# Altium PCB PCB1.PcbDoc (part 1 of 2)
Units mm, origin at the board's own origin, x right, y up, seen from the top; angles counter-clockwise.
Board outline 48.25 x 48.25 mm, 4 copper layers (Top Layer, Mid Layer 1, Mid Layer 2, Bottom Layer), stack 1.57 mm thick; 80 components, 62 nets, 377 pads, 167 vias.
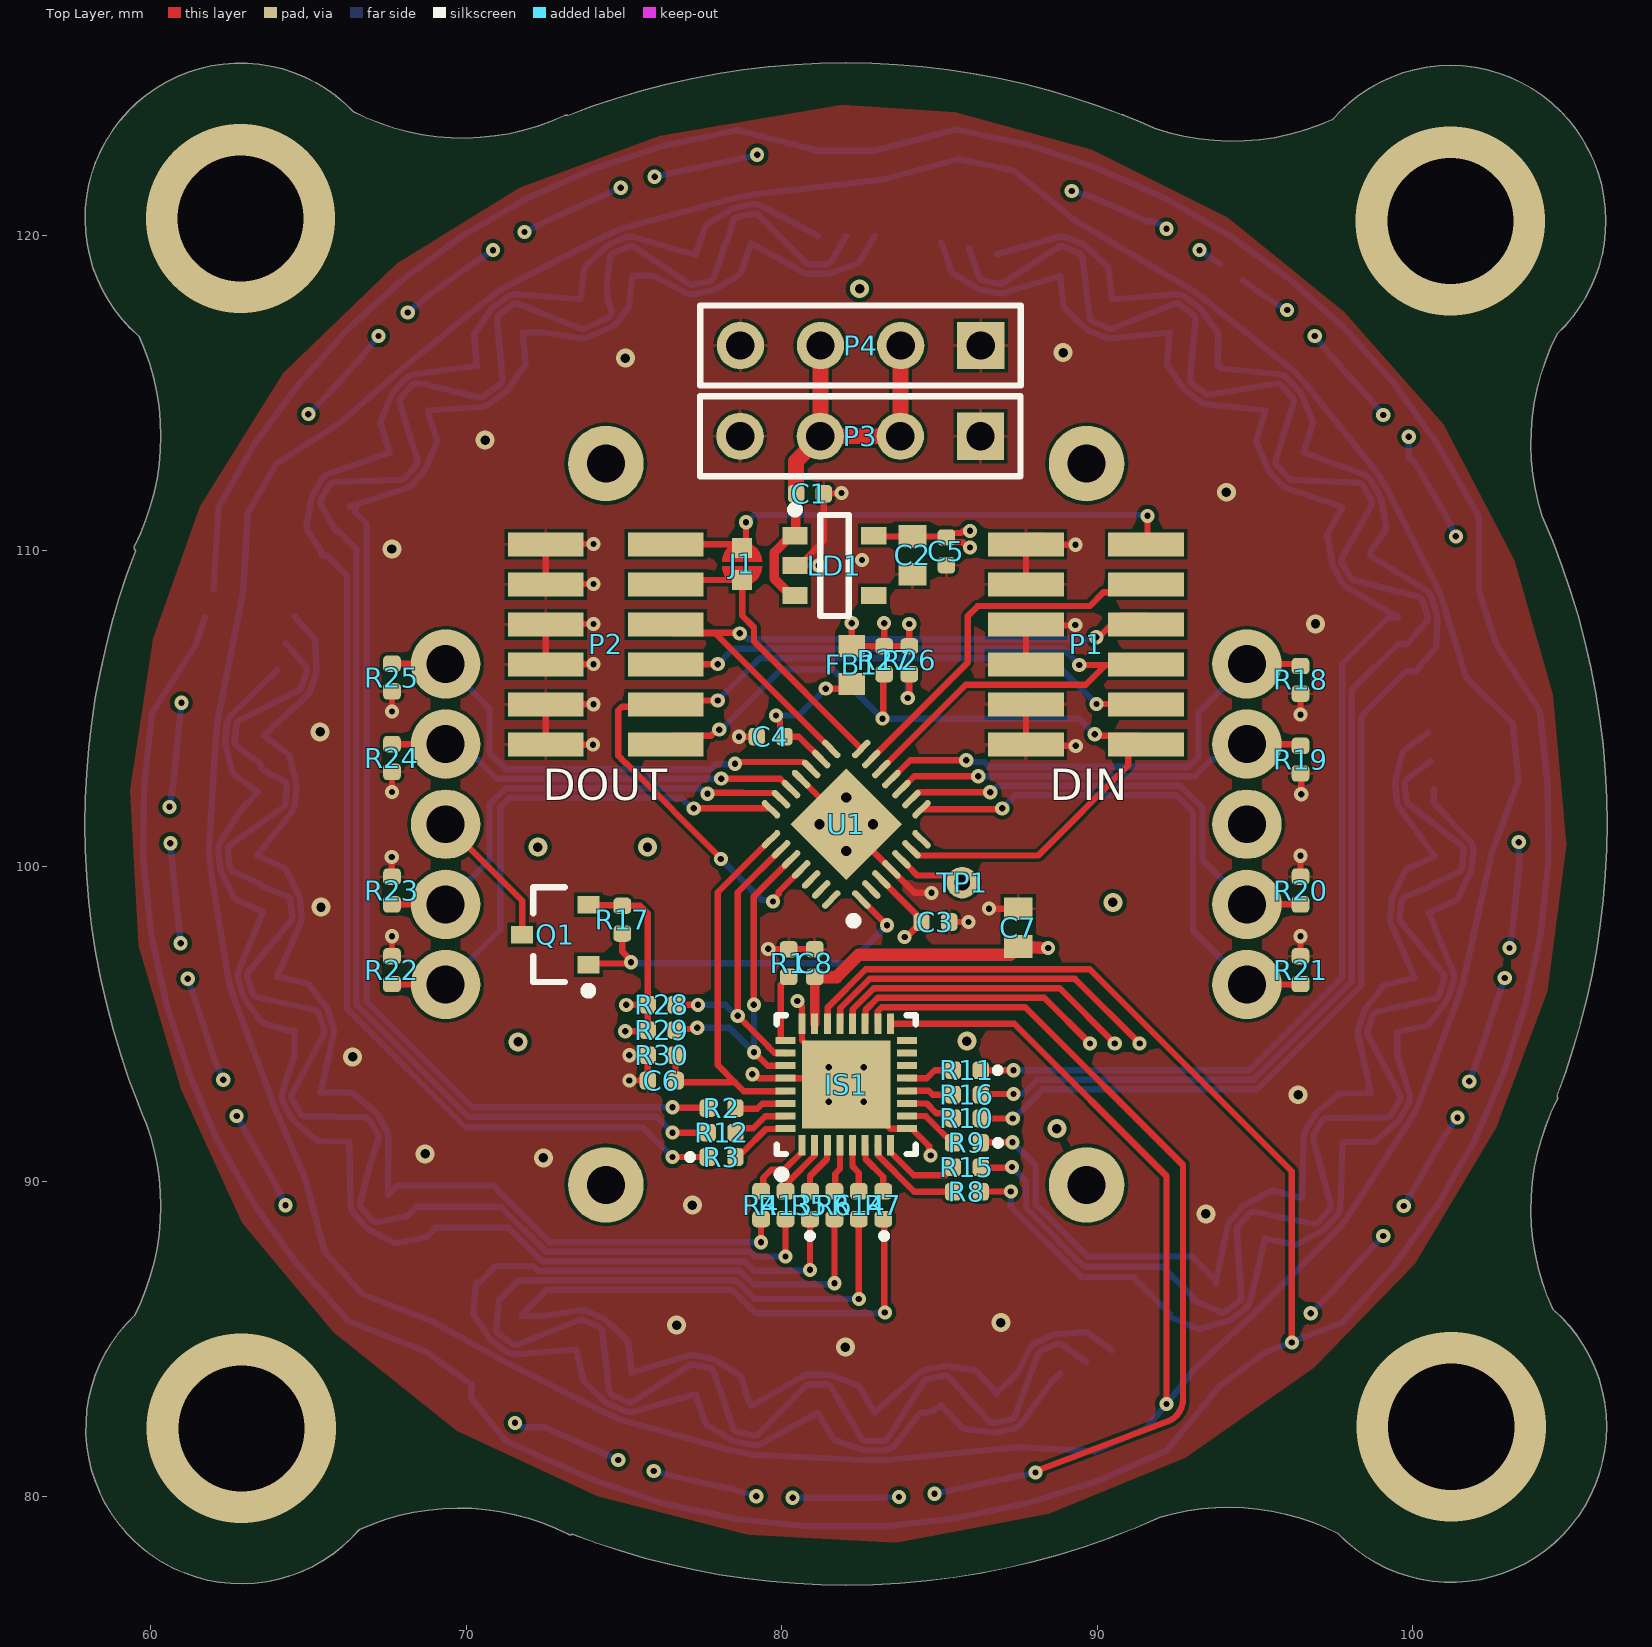
[diagram p0: Top Layer view]
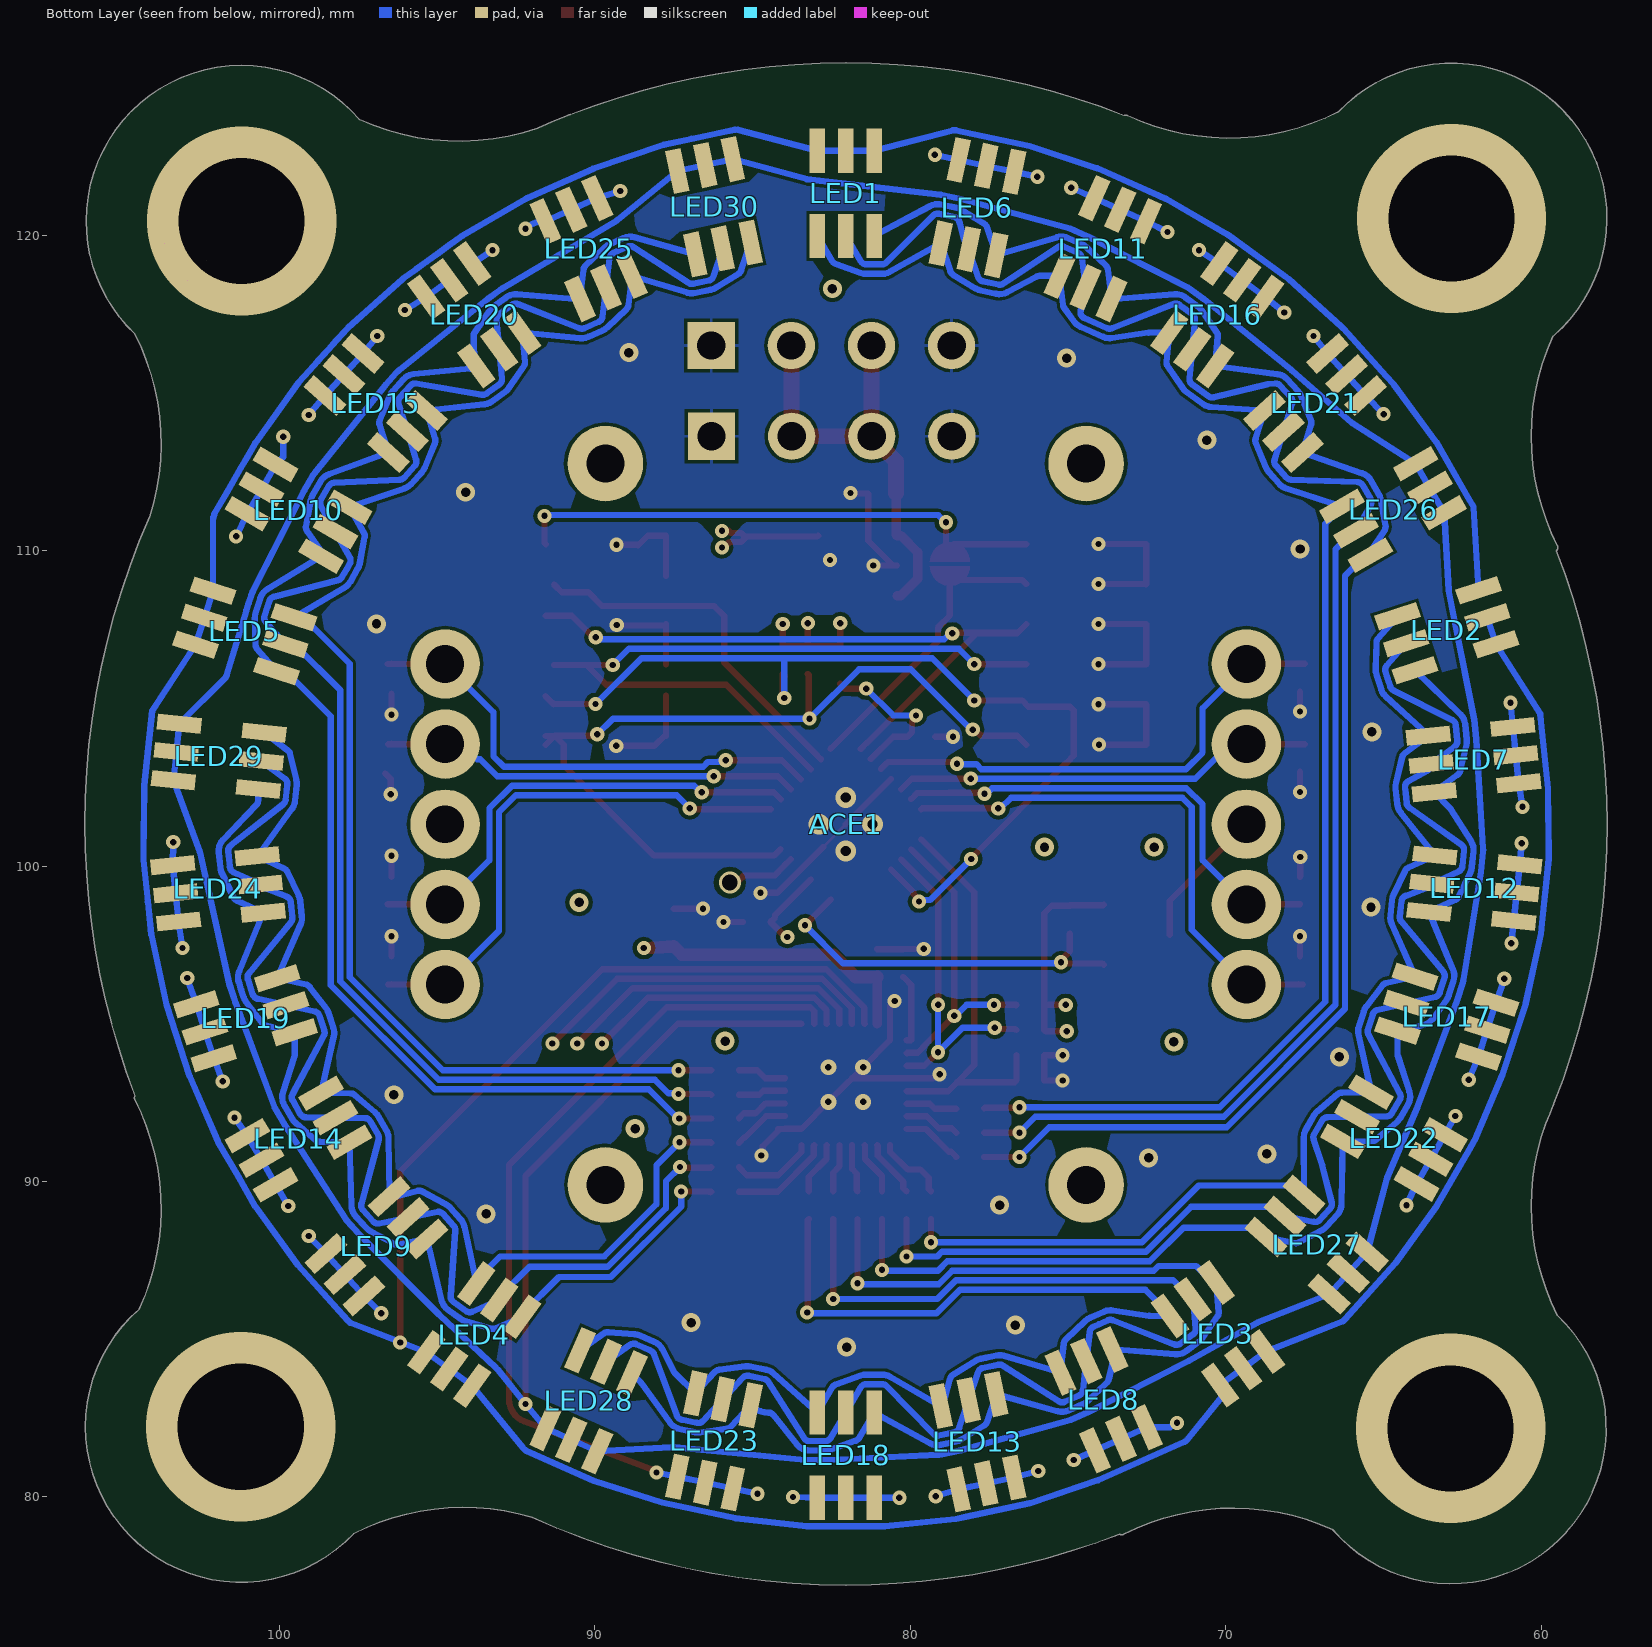
[diagram p1: Bottom Layer view, seen from below]
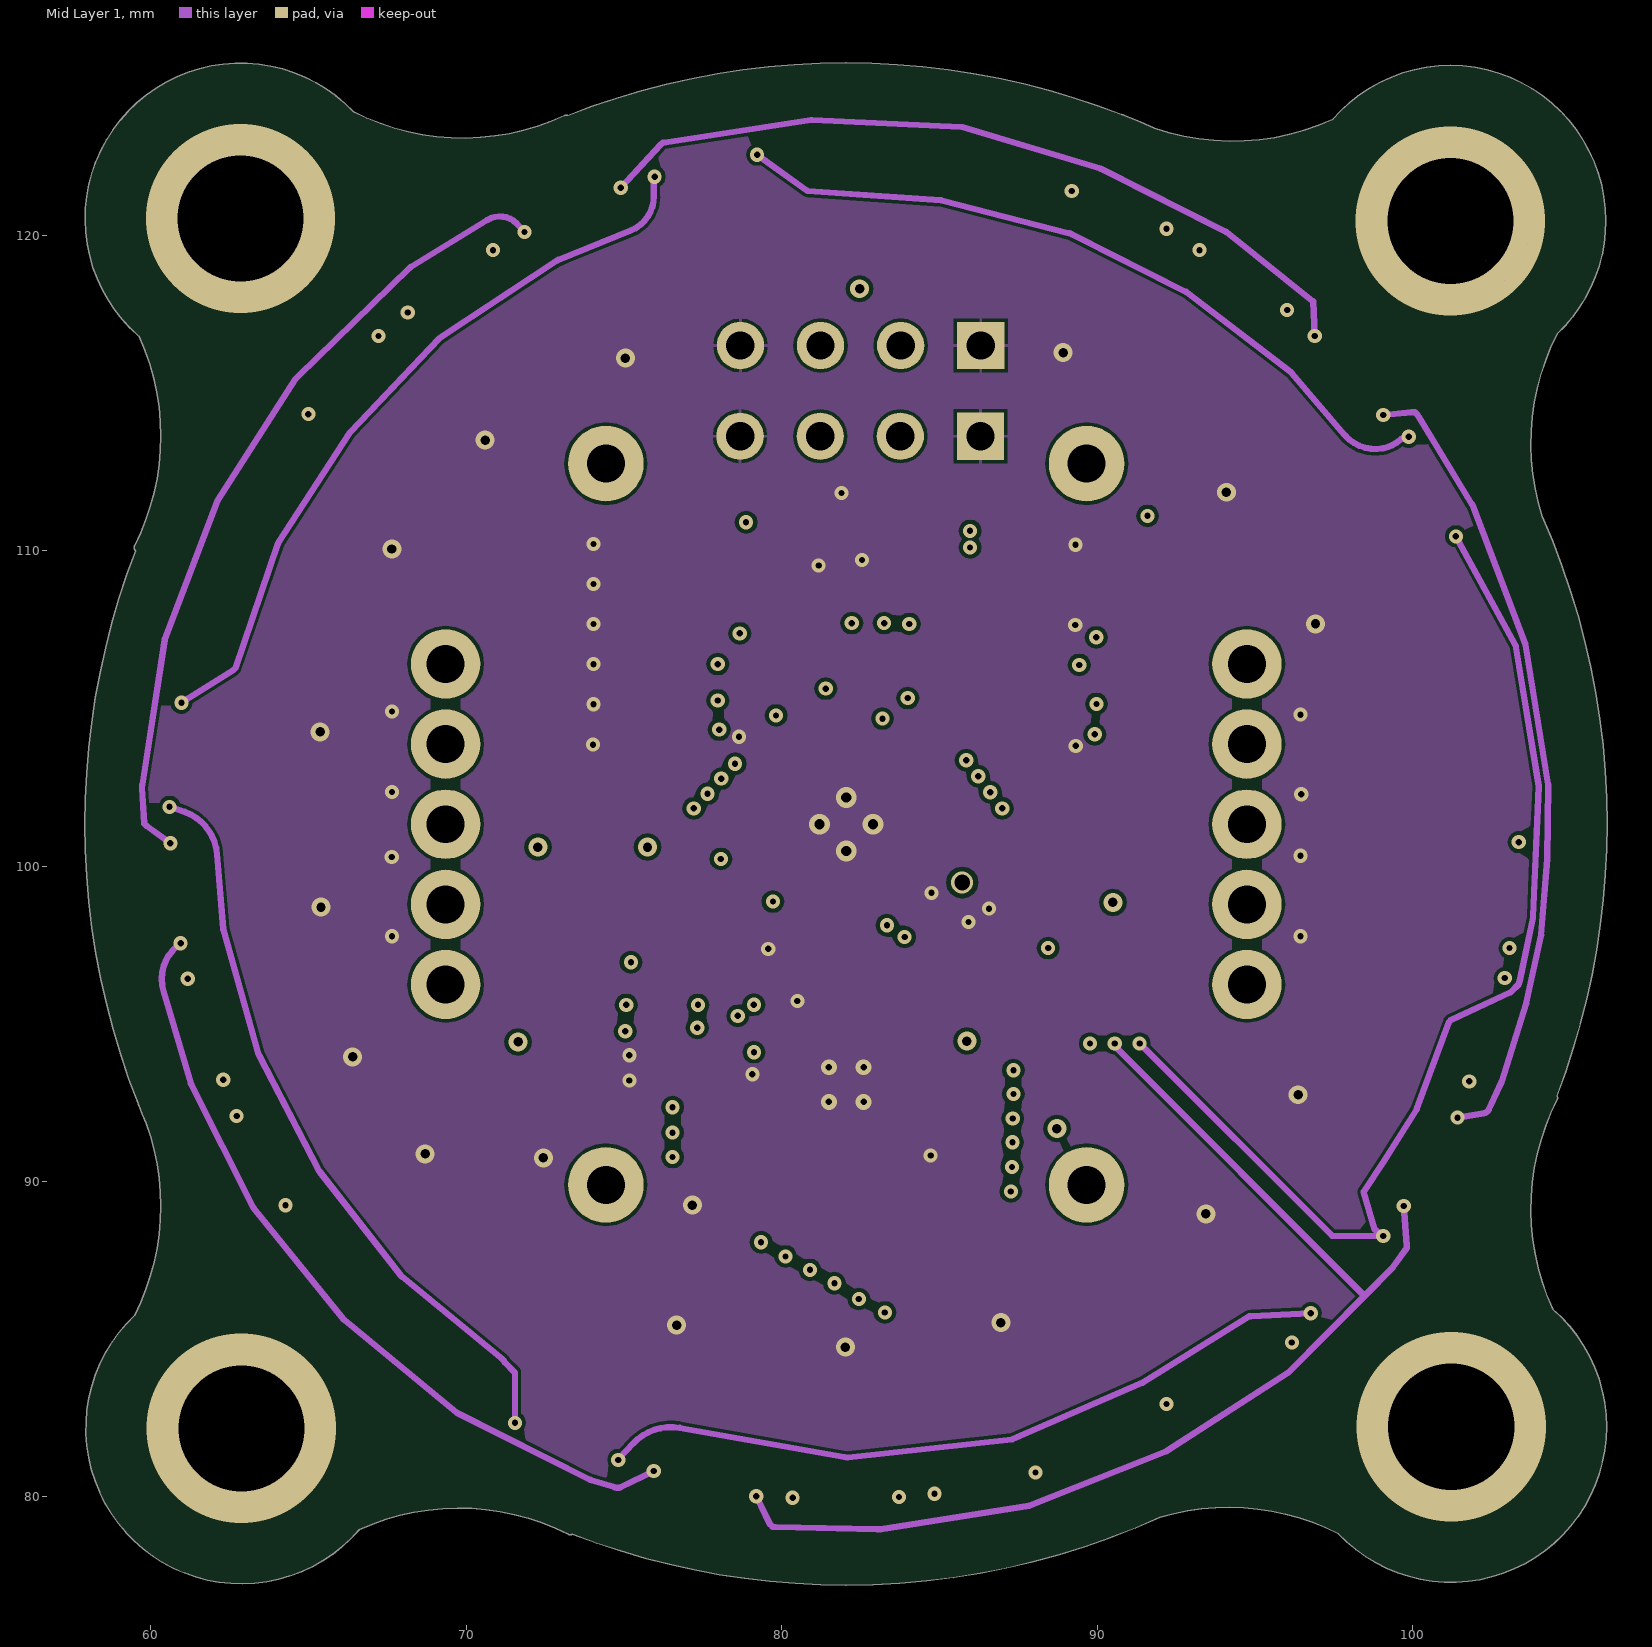
[diagram p2: Mid Layer 1]
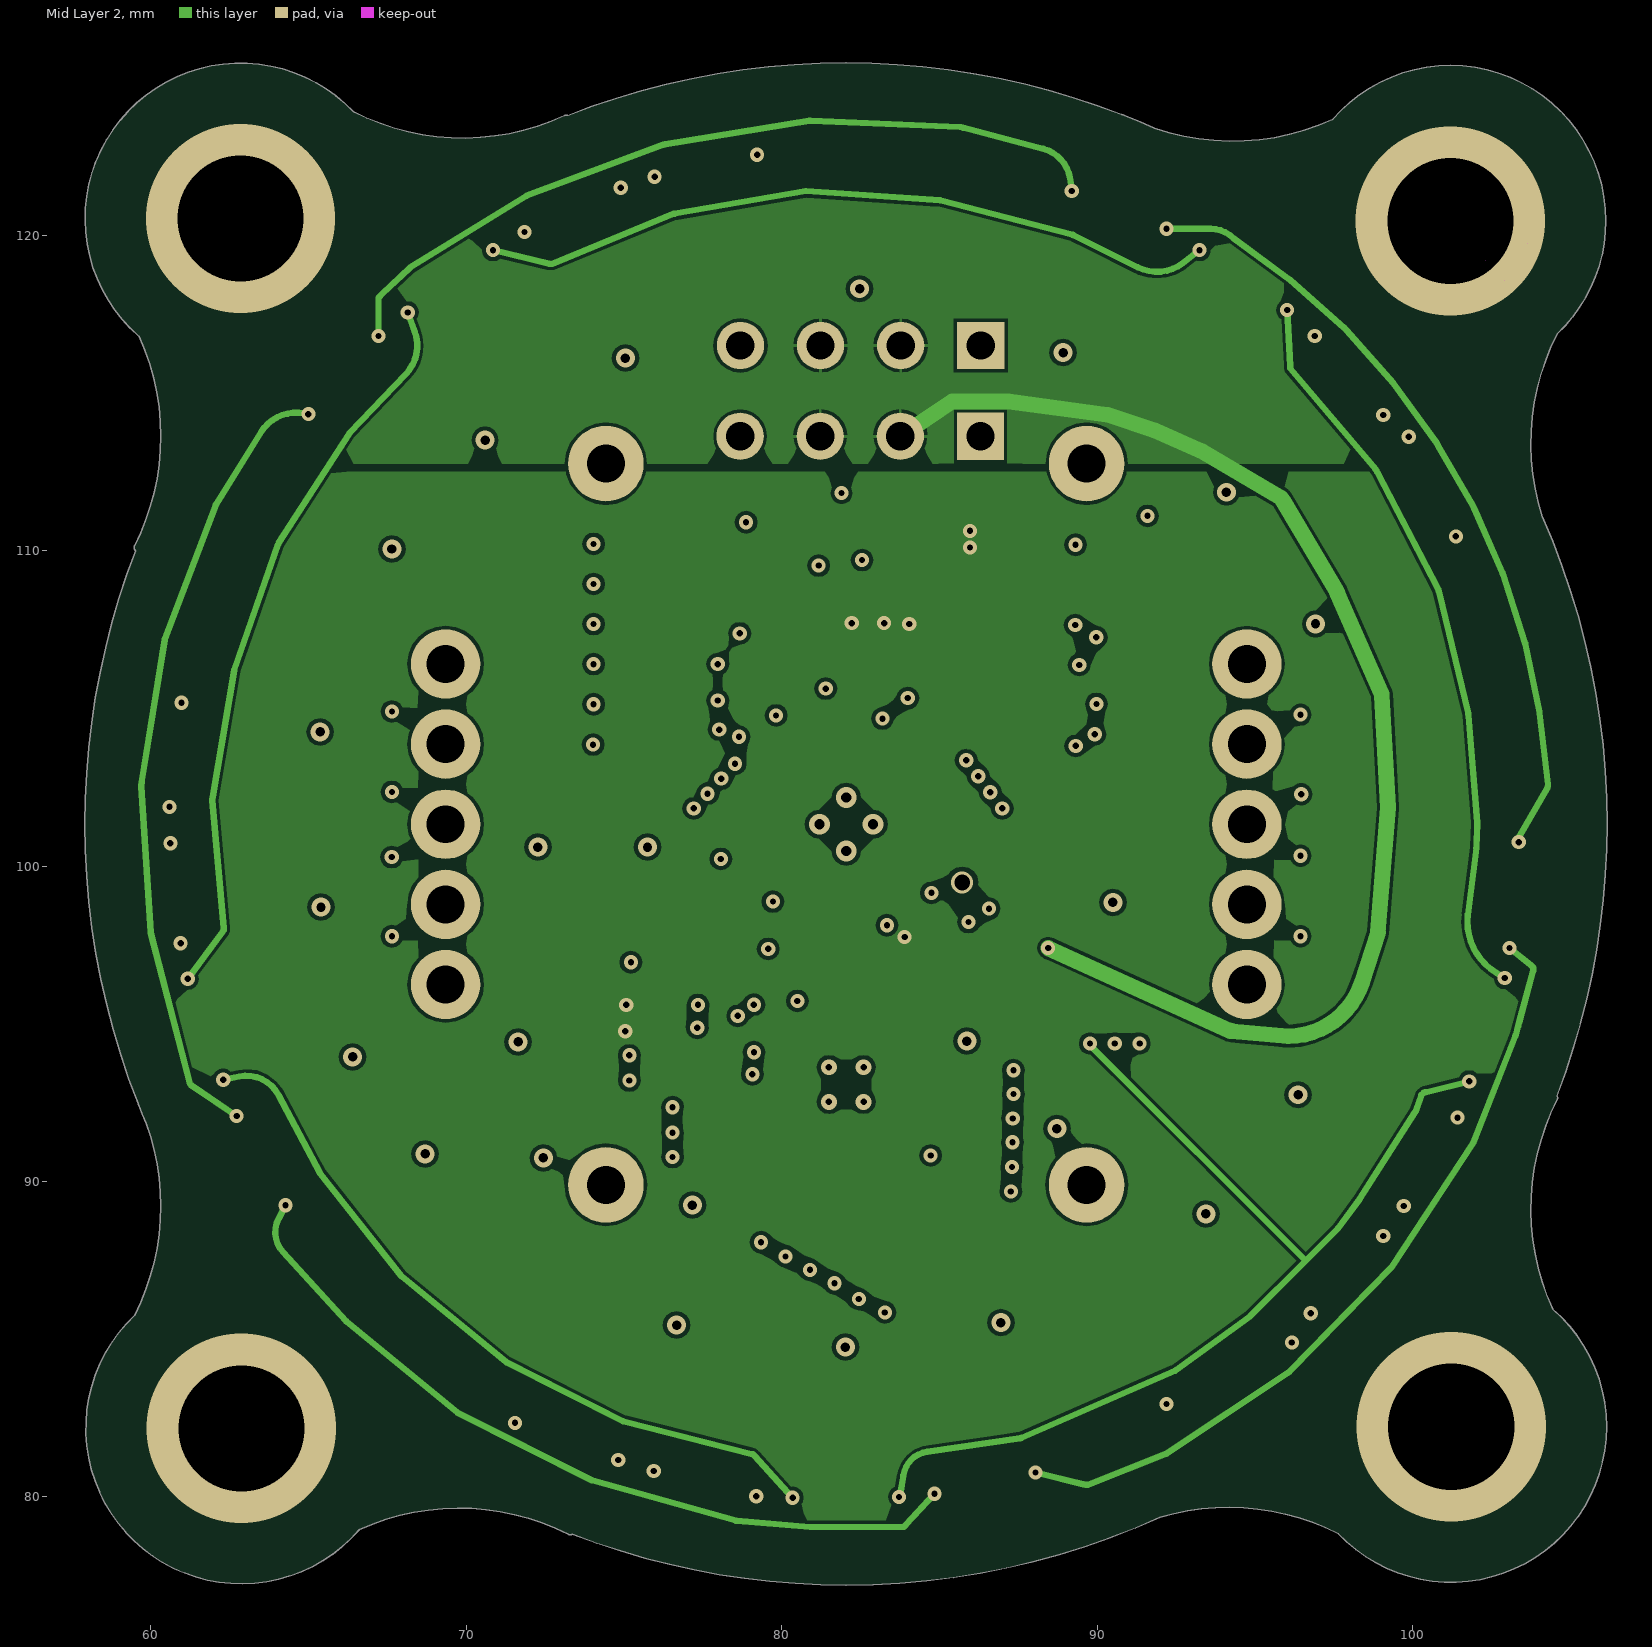
[diagram p3: Mid Layer 2]
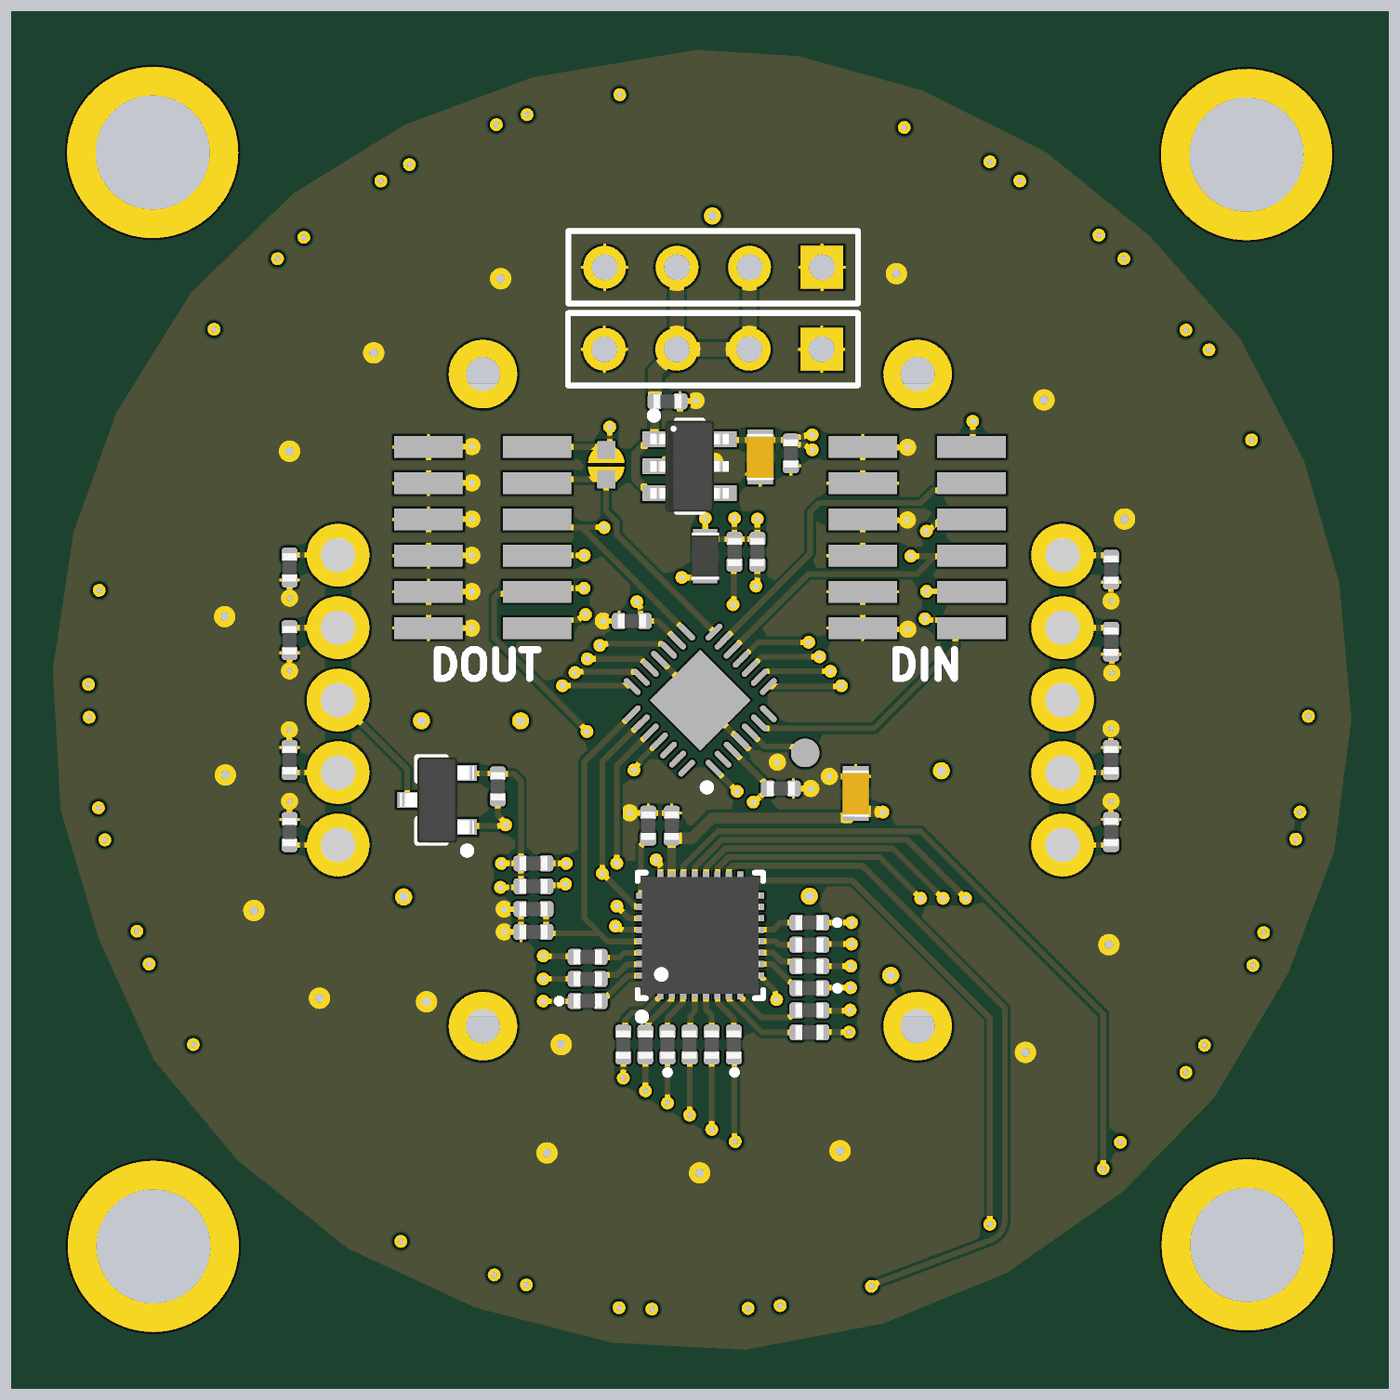
[diagram p5: 3D render of the assembled board from above, using the file's embedded part models]
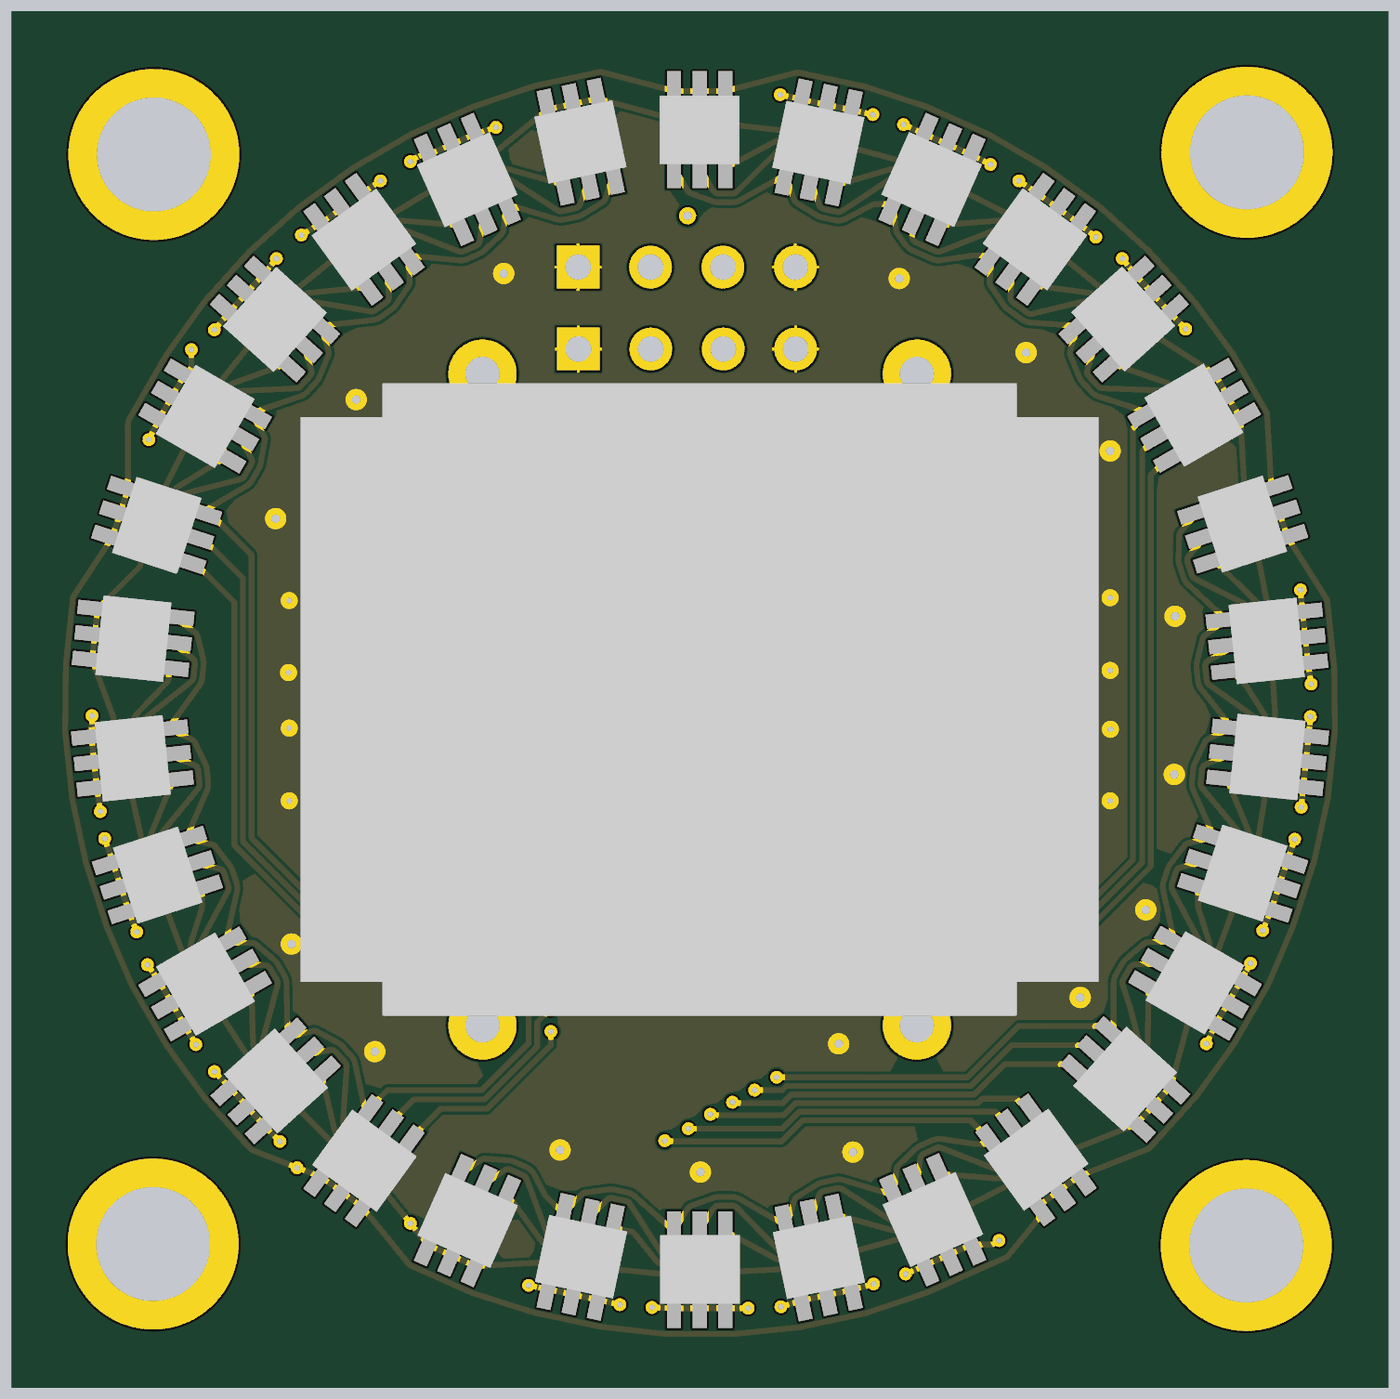
[diagram p6: 3D render of the assembled board from below, using the file's embedded part models]

## Layer stack, top to bottom
Top Solder: solder mask 0.0127, Solder Resist, Dk 3.8
Top Layer: signal copper 0.035
Dielectric 1: prepreg 0.2, 7628, Dk 4.6
Mid Layer 1: signal copper 0.0175
Core: core 1.065, FR-4, Dk 4.5
Mid Layer 2: signal copper 0.0175
Dielectric 2: prepreg 0.2, 7628, Dk 4.6
Bottom Layer: signal copper 0.035
Bottom Solder: solder mask 0.0127, Solder Resist, Dk 3.8

## Board outline
59.492,85.757 ccw(c52.685,89.223) 60.323,89.223 ccw(c52.685,89.223) 59.861,91.84 cw(c82.042,101.333) 59.619,92.426 ccw(c52.685,89.223) 59.61,92.446 cw(c59.725,92.5) 59.601,92.472 cw(c82.042,101.333) 57.915,101.333 cw(c82.042,101.333) 59.524,109.997 cw(c59.603,110.096) 59.49,110.154 ccw(c52.685,113.623) 60.323,113.623 ccw(c52.685,113.623) 59.635,116.79 cw(c62.85,120.525) 66.432,123.908 ccw(c69.898,130.715) 73.121,123.79 cw(c73.175,123.675) 73.226,123.792 cw(c82.042,101.333) 82.042,125.46 cw(c82.042,101.333) 90.776,123.824 cw(c90.771,123.697) 90.829,123.81 ccw(c94.298,130.615) 90.89,123.78 cw(c82.042,101.333) 91.821,123.39 ccw(c94.298,130.615) 97.465,123.665 cw(c101.2,120.45) 106.128,120.45 cw(c101.2,120.45) 104.583,116.868 ccw(c111.39,113.402) 104.115,111.075 cw(c82.042,101.333) 106.169,101.333 cw(c82.042,101.333) 104.58,92.721 cw(c104.472,92.654) 104.599,92.654 cw(c104.472,92.654) 104.585,92.596 ccw(c111.39,89.127) 104.44,85.96 cw(c101.225,82.225) 106.153,82.225 cw(c101.225,82.225) 97.643,78.842 ccw(c94.177,72.035) 91.998,79.356 cw(c82.042,101.333) 82.042,77.206 cw(c82.042,101.333) 73.369,78.819 cw(c73.304,78.928) 73.246,78.815 ccw(c69.777,72.01) 66.61,78.96 cw(c62.875,82.175)
cut-out: 102.925,118.55
cut-out: 103.65,119.75
cut-out: 102.325,119.2

## Design rules (kind name [scope] priority, off if disabled: settings)
BoardOutlineClearance [All] p1: gap=0.2 ignorepadtopadclearanceinfootprint=FALSE
Clearance [All] p1: gap=0.102 ignorepadtopadclearanceinfootprint=FALSE except(0.127: Arc-Via Track-Via SMDPad-Via THPad-Via Via-Via Via-Fill Via-Poly Via-Region Via-Text; 0.25: Arc-Hole Track-Hole SMDPad-Hole THPad-Hole Via-Hole Fill-Hole Poly-Hole Region-Hole Text-Hole)
ComponentClearance [All] p1: gap=0.102 collisioncheckmode=3 verticalgap=0.102 showdistances=TRUE
DiffPairsRouting [All] p1: maxlimit=0.102 minlimit=0.102 mostfreqgap=0.102 toplayer_minwidth=0.102 toplayer_maxwidth=1816.048 toplayer_prefwidth=0.102 midlayer1_minwidth=0.102 midlayer1_maxwidth=1816.048 midlayer1_prefwidth=0.102 midlayer2_minwidth=0.102 midlayer2_maxwidth=1816.048 midlayer2_prefwidth=0.102 bottomlayer_minwidth=0.102 bottomlayer_maxwidth=1816.048 bottomlayer_prefwidth=0.102 maxuncoupledlength=12.7
Height [All] p1: minheight=0 maxheight=1816.048 prefheight=12.7
HoleSize [All] p1: absolutevalues=TRUE maxlimit=6.3 minlimit=0.2 maxpercent=80.000 minpercent=20.000
HoleToHoleClearance [All] p1: gap=0.25 allowstackedmicrovias=FALSE
MinimumAnnularRing [All] p1: minimumring=0.076
MinimumSolderMaskSliver [All] p1: minsoldermaskwidth=0
PlaneClearance [All] p1: clearance=0.102
PlaneConnect PlaneConnectPowerPads [InPadClass('PowerPads')] p1: planeconnectstyle=Direct reliefexpansion=0.508 reliefentries=4 reliefconductorwidth=0.254 reliefairgap=0.254
PlaneConnect [All] p2: pad.planeconnectstyle=Relief pad.reliefexpansion=0.3 pad.reliefentries=4 pad.reliefconductorwidth=0.102 pad.reliefairgap=0.102 via.planeconnectstyle=Direct via.reliefexpansion=0.3 via.reliefentries=4 via.reliefconductorwidth=0.127 via.reliefairgap=0.127
PolygonConnect PolygonConnectPowerPads [All vs (InPadClass('PowerPads'))] p1: connectstyle=Direct reliefconductorwidth=0.254 reliefentries=4 polygonreliefangle="90 Angle" airgapwidth=0.254
PolygonConnect [All] p2: thpad.connectstyle=Relief thpad.reliefconductorwidth=0.102 thpad.reliefentries=4 thpad.polygonreliefangle="90 Angle" thpad.airgapwidth=0.102 smdpad.connectstyle=Relief smdpad.reliefconductorwidth=0.102 smdpad.reliefentries=4 smdpad.polygonreliefangle="90 Angle" smdpad.airgapwidth=0.102 via.connectstyle=Direct via.reliefconductorwidth=0.127 via.reliefentries=4 via.polygonreliefangle="90 Angle" via.airgapwidth=0.127
RoutingVias [All] p1: holewidth=0.2 width=0.45 viastyle="Through Hole" minholewidth=0.2 minwidth=0.45 maxholewidth=6.3 maxwidth=6.55
SilkToSilkClearance [All] p1: silktosilkclearance=0
SilkToSolderMaskClearance [IsPad] p1: minsilkscreentomaskgap=0.102 clearancetoexposedcopper=TRUE
SolderMaskExpansion [All] p1: expansion=0.075 istentingtop=FALSE
Width [All] p1: maxlimit=1816.048 minlimit=0.102 preferedwidth=0.102
20 further rules are at their usual default settings.

## Classes and differential pairs
component class U_led_ring: C7 C8 IS1 LED1 LED2 LED3 LED4 LED5 LED6 LED7 LED8 LED9 LED10 LED11 LED12 LED13 LED14 LED15 LED16 LED17 LED18 LED19 LED20 LED21 LED22 LED23 LED24 LED25 LED26 LED27 LED28 LED29 LED30 R2 R3 R4 R5 R6 R7 R8 R9 R10 R11 R12 R13 R14 R15 R16
component class U_ACE: ACE1 Q1 R17 R18 R19 R20 R21 R22 R23 R24 R25
component class main_sch: C1 C2 C3 C4 C5 C6 FB1 J1 LD1 P1 P2 P3 P4 R1 R26 R27 R28 R29 R30 TP1 U1

## Components (designator, comment, footprint, x,y, rotation, side; value= is the part's Value field where it differs from the comment)
ACE1 "Bourns ACE 128" "BOURNS ACE 128" 82.05,101.325 r0 bottom locked
C1 "100n" R1005_0402i_L 80.9,111.8 r0 top
C2 "1u" C1608_0603I_L 84.15,109.85 r270 top
C3 "100n" R1005_0402i_L 84.875,98.225 r0 top
C4 "100n" R1005_0402i_L 79.65,104.1 r180 top
C5 "100n" R1005_0402i_L 85.225,109.975 r270 top
C6 "100n" R1005_0402i_L 76.2,93.2 r180 top
C7 "1u" C1608_0603I_L 87.5,98.05 r90 top
C8 "100n" R1005_0402i_L 81.05,96.925 r90 top
FB1 "FERITTE BEAD" R1608_0603I_L 82.225,106.375 r270 top
IS1 "IS31FL3729" QFN40P400X400X80_HS-33L 82.05,93.075 r90 top
J1 "Terminator" solderJumper 78.75,109.575 r270 top
LD1 "NCP115 3.3V" TSOP95P280X110-6L 81.675,109.525 r0 top
LED1 "SMB-LED" ASMB-LED 82.05,121.325 r270 bottom
LED2 "SMB-LED" ASMB-LED 63,107.475 r342 bottom
LED3 "SMB-LED" ASMB-LED 70.25,85.175 r54 bottom
LED4 "SMB-LED" ASMB-LED 93.825,85.15 r126 bottom
LED5 "SMB-LED" ASMB-LED 101.1,107.45 r198 bottom
LED6 "SMB-LED" ASMB-LED 77.875,120.875 r282 bottom
LED7 "SMB-LED" ASMB-LED 62.15,103.375 r354 bottom
LED8 "SMB-LED" ASMB-LED 73.875,83.075 r66 bottom
LED9 "SMB-LED" ASMB-LED 96.925,87.95 r138 bottom
LED10 "SMB-LED" ASMB-LED 99.4,111.275 r210 bottom
LED11 "SMB-LED" ASMB-LED 73.9,119.575 r294 bottom
LED12 "SMB-LED" ASMB-LED 62.125,99.3 r6 bottom
LED13 "SMB-LED" ASMB-LED 77.875,81.75 r78 bottom
LED14 "SMB-LED" ASMB-LED 99.4,91.35 r150 bottom
LED15 "SMB-LED" ASMB-LED 96.95,114.675 r222 bottom
LED16 "SMB-LED" ASMB-LED 70.275,117.475 r306 bottom
LED17 "SMB-LED" ASMB-LED 63,95.225 r18 bottom
LED18 "SMB-LED" ASMB-LED 82.05,81.325 r90 bottom
LED19 "SMB-LED" ASMB-LED 101.075,95.175 r162 bottom
LED20 "SMB-LED" ASMB-LED 93.825,117.475 r234 bottom
LED21 "SMB-LED" ASMB-LED 67.175,114.675 r318 bottom
LED22 "SMB-LED" ASMB-LED 64.675,91.375 r30 bottom
LED23 "SMB-LED" ASMB-LED 86.225,81.775 r102 bottom
LED24 "SMB-LED" ASMB-LED 101.95,99.275 r174 bottom
LED25 "SMB-LED" ASMB-LED 90.2,119.575 r246 bottom
LED26 "SMB-LED" ASMB-LED 64.7,111.3 r330 bottom
LED27 "SMB-LED" ASMB-LED 67.125,88 r42 bottom
LED28 "SMB-LED" ASMB-LED 90.2,83.05 r114 bottom
LED29 "SMB-LED" ASMB-LED 101.925,103.475 r186 bottom
LED30 "SMB-LED" ASMB-LED 86.225,120.9 r258 bottom
P1 "Input" "1.27MM SMD CONN" 89.65,107.025 r90 top
P2 "Output" "1.27MM SMD CONN" 74.425,107.025 r90 top
P3 "PWR" HDR1X4 86.305,113.625 r180 top
P4 "PWR" HDR1X4 86.315,116.5 r180 top
Q1 "NX3008PBKT" SOT95P230X110-3L 72.825,97.825 r180 top
R1 "10k" R1005_0402i_L 80.225,96.925 r90 top
R2 "20" R1005_0402i_L 78.1,92.325 r180 top
R3 "51" R1005_0402i_L 78.1,90.775 r180 top
R4 "20" R1005_0402i_L 79.35,89.25 r270 top
R5 "51" R1005_0402i_L 80.9,89.25 r270 top
R6 "20" R1005_0402i_L 81.675,89.25 r270 top
R7 "51" R1005_0402i_L 83.225,89.25 r270 top
R8 "20" R1005_0402i_L 85.875,89.675 r0 top
R9 "51" R1005_0402i_L 85.875,91.225 r0 top
R10 "20" R1005_0402i_L 85.875,92 r0 top
R11 "51" R1005_0402i_L 85.875,93.525 r0 top
R12 "20" R1005_0402i_L 78.1,91.55 r180 top
R13 "20" R1005_0402i_L 80.125,89.25 r270 top
R14 "20" R1005_0402i_L 82.45,89.25 r270 top
R15 "20" R1005_0402i_L 85.875,90.45 r0 top
R16 "20" R1005_0402i_L 85.875,92.75 r0 top
R17 "100k" R1005_0402i_L 74.95,98.3 r90 top
R18 "10k" R1005_0402i_L 96.45,105.9 r90 top
R19 "10k" R1005_0402i_L 96.45,103.375 r90 top
R20 "10k" R1005_0402i_L 96.45,99.225 r270 top
R21 "10k" R1005_0402i_L 96.45,96.7 r270 top
R22 "10k" R1005_0402i_L 67.65,96.7 r270 top
R23 "10k" R1005_0402i_L 67.65,99.225 r270 top
R24 "10k" R1005_0402i_L 67.65,103.425 r90 top
R25 "10k" R1005_0402i_L 67.65,105.975 r90 top
R26 "100k" R1005_0402i_L 84.05,106.525 r270 top
R27 "100k" R1005_0402i_L 83.25,106.525 r270 top
R28 "100k" R1005_0402i_L 76.2,95.6 r0 top
R29 "100k" R1005_0402i_L 76.2,94.8 r0 top
R30 "100k" R1005_0402i_L 76.2,94 r180 top
TP1 "PAD" PAD 85.725,99.475 r90 top
U1 "ATtiny88-MMU" 28M1_N 82.05,101.325 r135 top

## Footprints (in the part's own frame and the unit in brackets; to place one, negate y for a bottom-side part, rotate by r counter-clockwise, add the part's x,y. Pads: shape width x height; smd on the part's side, far side on the other; paste and mask are expansions set on the pad)
"1.27MM SMD CONN" [mm]
  rect 0.76x2.4 smd: 1(3.175,1.905) 2(3.175,-1.905) 3(1.905,1.905) 4(1.905,-1.905) 5(0.635,1.905) 6(0.635,-1.905) 7(-0.635,1.905) 8(-0.635,-1.905) 9(-1.905,1.905) 10(-1.905,-1.905) 11(-3.175,1.905) 12(-3.175,-1.905)
28M1_N [mm] "QFN, 28-Leads, Body 4x4mm, Pitch 0.45mm, IPC Medium Density"
  oval 0.75x0.2 smd: 1(-2.025,1.35) 2(-2.025,0.9) 3(-2.025,0.45) 4(-2.025,0) 5(-2.025,-0.45) 6(-2.025,-0.9) 7(-2.025,-1.35) 15(2.025,-1.35) 16(2.025,-0.9) 17(2.025,-0.45) 18(2.025,0) 19(2.025,0.45) 20(2.025,0.9) 21(2.025,1.35)
  oval 0.2x0.75 smd: 8(-1.35,-2.025) 9(-0.9,-2.025) 10(-0.45,-2.025) 11(0,-2.025) 12(0.45,-2.025) 13(0.9,-2.025) 14(1.35,-2.025) 22(1.35,2.025) 23(0.9,2.025) 24(0.45,2.025) 25(0,2.025) 26(-0.45,2.025) 27(-0.9,2.025) 28(-1.35,2.025)
  rect 2.5x2.5 smd: 29(0,0)
  silkscreen extent -2.45,1.88 -2.2,2.12, body extent -2.02,-2.02 2.02,2.02, height 1
ASMB-LED [mm]
  rect 1.4x0.5 smd: 1(-1.35,0.9) 2(1.35,0.9) 3(-1.35,0) 4(1.35,0) 5(-1.35,-0.9) 6(1.35,-0.9)
  body extent -1.19,-1.41 1.21,1.39, height 2.8
"BOURNS ACE 128" [mm]
  round 2.2 hole 1.2: 1(-12.7,5.08) 2(-12.7,2.54) 3(-12.7,0) 4(-12.7,-2.54) 5(-12.7,-5.08) 6(12.7,-5.08) 7(12.7,-2.54) 8(12.7,0) 9(12.7,2.54) 10(12.7,5.08)
  round 2.4 hole 1.2: ""(-7.62,-11.43) ""(-7.62,11.43) ""(7.62,-11.43) ""(7.62,11.43)
  body extent -14,-11.1 14,11.1, height 27.55
C1608_0603I_L [mm] "Chip Capacitor, 2-Leads, Body 1.57x0.85mm, IPC High Density"
  rect 0.72x0.9 smd: 1(-0.6,0) 2(0.6,0)
  body extent -0.82,-0.48 0.82,0.48, height 0.95
HDR1X4 [mm] "Connector; Header; 4 Position"
  rect 1.5x1.5 hole 0.9: 1(0,0)
  round 1.5 hole 0.9: 2(2.54,0) 3(5.08,0) 4(7.62,0)
  silkscreen extent -1.27,-1.27 8.89,1.27
PAD [mm]
  round 1 smd: 1(0,0)
QFN40P400X400X80_HS-33L [mm] "QFN, 32-Leads, Body 4,00x4,00mm, Pitch 0,40mm, Thermal Pad 2,80x2,80mm, IPC High Density"
  rect 0.64x0.22 smd: 1(-1.925,1.4) 2(-1.925,1) 3(-1.925,0.6) 4(-1.925,0.2) 5(-1.925,-0.2) 6(-1.925,-0.6) 7(-1.925,-1) 8(-1.925,-1.4) 17(1.925,-1.4) 18(1.925,-1) 19(1.925,-0.6) 20(1.925,-0.2) 21(1.925,0.2) 22(1.925,0.6) 23(1.925,1) 24(1.925,1.4)
  rect 0.22x0.64 smd: 9(-1.4,-1.925) 10(-1,-1.925) 11(-0.6,-1.925) 12(-0.2,-1.925) 13(0.2,-1.925) 14(0.6,-1.925) 15(1,-1.925) 16(1.4,-1.925) 25(1.4,1.925) 26(1,1.925) 27(0.6,1.925) 28(0.2,1.925) 29(-0.2,1.925) 30(-0.6,1.925) 31(-1,1.925) 32(-1.4,1.925)
  rect 2.8x2.8 smd: 33(0,0)
  silkscreen extent -2.97,-2.2 2.2,2.2, body extent -2.05,-2.05 2.05,2.05, height 0.8
R1005_0402i_L [mm] "Resistor, Chip; 1.00 mm L X 0.50 mm W X 0.40 mm H body"
  rrect50% 0.52x0.56 smd: 1(-0.44,0) 2(0.44,0)
  body extent -0.5,-0.25 0.5,0.25, height 0.4
R1608_0603I_L [mm] "Chip Resistor, 2-Leads, Body 1.57x0.85mm, IPC High Density"
  rect 0.7x0.85 smd: 1(-0.6,0) 2(0.6,0)
  body extent -0.82,-0.48 0.82,0.48, height 0.5
solderJumper [mil]
  rect 25x25 smd: 1(20,0) 2(-20,0)
  Top Layer region: 2.51,25 12.08,23.1 20.19,17.68 25.61,9.57 27.51,0 27.51,0 25.61,-9.57 20.19,-17.68 12.08,-23.1 2.51,-25 2.51,-25
  Top Layer region: -2.51,25 -12.08,23.1 -20.19,17.68 -25.61,9.57 -27.51,0 -27.51,0 -25.61,-9.57 -20.19,-17.68 -12.08,-23.1 -2.51,-25 -2.51,-25
SOT95P230X110-3L [mm] "SOT23, 3-Leads, Body 2,90x2,30mm, Pitch 0,95mm, IPC High Density"
  rect 0.7x0.55 smd: 1(-1.05,0.95) 2(-1.05,-0.95) 3(1.05,0)
  silkscreen extent -1.18,-1.5 0.7,1.9, body extent -1.3,-1.5 1.3,1.5, height 1.1
TSOP95P280X110-6L [mm] "TSOP, 6-Leads, Body 2,87x1,50mm, Pitch 0,95mm, IPC High Density"
  rect 0.8x0.55 smd: 1(-1.25,0.95) 2(-1.25,0) 3(-1.25,-0.95) 4(1.25,-0.95) 5(1.25,0.95)
  silkscreen extent -1.37,-1.6 0.45,1.9, body extent -1.38,-1.6 1.38,1.6, height 1.1

## Part data
C1 C2 C3 C4 C5 C6 C7 C8: library part C, "Capacitor"
J1: library part JMP_mini
LED1 LED2 LED3 LED4 LED5 LED6 LED7 LED8 LED9 LED10 LED11 LED12 LED13 LED14 LED15 LED16 LED17 LED18 LED19 LED20 LED21 LED22 LED23 LED24 LED25 LED26 LED27 LED28 LED29 LED30: library part ASMB-LED
P1 P2: library part "Header 6X2", "Header, 6-Pin, Dual row", LatestRevisionDate=17-Jul-2002, LatestRevisionNote="Re-released for DXP Platform.", Publisher="Altium Limited"
P3 P4: library part "Header 4", "Header, 4-Pin", LatestRevisionDate=17-Jul-2002, LatestRevisionNote="Re-released for DXP Platform.", Publisher="Altium Limited"
Q1: library part MOSFET-P, "P-Channel MOSFET", LatestRevisionDate=17-Jul-2002, LatestRevisionNote="Re-released for DXP Platform.", PackageDescription="TO, Flat Index; 3 In-Line, Axial Leads; Body Dia. 4.6mm; Lead Dia. 0.5 mm (max)", PackageReference=E3, PackageVersion=1995/1996, Published=8-Jun-2000, Publisher="Altium Limited"
R1 R2 R3 R4 R5 R6 R7 R8 R9 R10 R11 R12 R13 R14 R15 R16 R17 R18 R19 R20 R21 R22 R23 R24 R25 R26 R27 R28 R29 R30: library part R, "R"
U1: "8-bit AVR Microcontroller, 1.8-5.5V, 8KB Flash, 64 Bytes EEPROM, 512 Bytes SRAM, 28-pin MLF, Industrial Grade (-40°C to 85°C), Pb-Free", Supplier Part Number 1=ATTINY88-MMU-ND, ComponentLink1Description="Manufacturer Link", ComponentLink1URL=http://www.atmel.com/products/avr/default.asp?, ComponentLink2Description="ATtiny48/88 Datasheet", ComponentLink2URL=http://www.atmel.com/dyn/resources/prod_documents/doc8008.pdf, ComponentLink3Description="ATtiny48/88 Summary", ComponentLink3URL=http://www.atmel.com/dyn/resources/prod_documents/8008S.pdf, ComponentLink4Description="Atmel.com Home", ComponentLink4URL=http://www.atmel.com, DatasheetVersion="revC, Mar-2009", PackageDescription="28-pad, 4x4x1.0mm Body, Pitch 0.45mm, 2.4x2.4mm Exposed Pad, Plastic Very Thin QFN Package (VQFN)", PackageReference=28M1, PackageVersion="revB, Nov-2008", Published=1-Apr-2010, Publisher="Altium Limited", Supplier 1=Digi-Key, Supplier 2=Mouser, Supplier Part Number 2=556-ATTINY88-MMU

## Via types
v1: diameter 0.45, hole 0.2, Top Layer to Bottom Layer, 130 vias
v2: diameter 0.6, hole 0.3, Top Layer to Bottom Layer, 24 vias
v3: diameter 6, hole 4, Top Layer to Bottom Layer, 4 vias
v4: diameter 0.5, hole 0.2, Top Layer to Bottom Layer, 4 vias
v5: diameter 0.66, hole 0.33, Top Layer to Bottom Layer, tented top, 4 vias
v6: diameter 0.7, hole 0.5, Top Layer to Bottom Layer, 1 vias

## Nets (pads, with @x,y where several pads share a name; then routed paths per layer and width w, separated by ;. In a path a pad name is that pad's centre, name@x,y a point inside that pad or via, vN(x,y) a via of type N, cw(c..) or ccw(c..) an arc to the next point about the centre after c; other vN are vias at no path point)
+3.3V: C2.1 C3.1 C5.1 FB1.1 LD1.5 Q1.2 R17.2 R26.1 R27.1 R28.1 R29.1 U1.3 | length 17.8
  Top Layer w0.2: Q1.2@73.875,98.775 73.893,98.757 74.932,98.757 R17.2@74.95,98.74 75.52,98.74 75.76,98.5 R28.1@75.76,95.6 ; v1(75.046,94.761) 75.721,94.761 R29.1@75.76,94.8 R28.1@75.76,95.6 ; v1(75.075,95.6) R28.1@75.76,95.6 ; v1(82.225,107.7) FB1.1@82.225,106.975 82.235,106.965 R27.1@83.25,106.965 ; LD1.5@82.925,110.475 82.955,110.445 85.195,110.445 C5.1@85.225,110.415 ; U1.3@83.164,99.575 84.019,98.719 84.294,98.445 84.294,98.366 C3.1@84.435,98.225 83.96,97.75 v1(83.9,97.75) ; v1(83.25,107.7) R27.1@83.25,106.965 ; v1(84.05,107.675) R26.1@84.05,106.965 R27.1@83.25,106.965 ; v1(85.975,110.1) 85.907,110.1 85.734,110.274 85.366,110.274 C5.1@85.225,110.415 ; v1(85.975,110.625) 85.758,110.625 85.689,110.556 85.366,110.556 C5.1@85.225,110.415
+5: C1.1 C7.1 C8.1 IS1.23 LD1.1 LD1.3 P3.2 P3.3 P4.2 P4.3 | length 64.3
  Top Layer w0.3: LD1.3@80.425,108.575 80.3,108.575 79.773,109.102 79.773,109.948 80.3,110.475 LD1.1@80.425,110.475 80.442,110.493 80.442,111.782 C1.1@80.46,111.8 C1.1@80.46,111.82 ; IS1.23@81.05,95 C8.1@81.05,96.485
  Top Layer w0.4: C8.1@81.05,96.485 81.055,96.48 81.745,96.48 ; 81.75,96.475 81.745,96.48 ; v1(88.45,97.4) C7.1@87.5,97.45 87.24,97.19 82.455,97.19 81.745,96.48
  Top Layer w0.5: C1.1@80.46,111.82 80.46,112.83 P3.3@81.225,113.595 ; P4.3@81.235,116.5 81.23,116.495 P3.3@81.23,113.625 ; P4.2@83.775,116.5 83.77,116.495 83.77,113.63 P3.2@83.765,113.625 P3.3@81.23,113.625 ; P3.3@81.225,113.595 81.23,113.6 P3.3@81.23,113.625 ; P3.3@81.225,113.595 P3.3@81.225,113.625 P3.3@81.23,113.625
  Mid Layer 2 w0.5: P3.2@83.765,113.625 85.409,114.727 87.201,114.727 90.313,114.307 91.827,113.808 91.85,113.8 93.354,113.135 ; v1(88.45,97.4) 94.198,94.785 ; 93.298,113.163 cw(c93.099,112.705) 93.354,113.135 ; 94.199,94.784 ccw(c94.281,94.967) 94.263,94.768 96.052,94.603 ccw(c96.071,94.802) 96.073,94.602 ccw(c96.043,97.075) 98.395,96.313 98.9,97.875 98.902,97.898 99.225,101.844 99.225,101.858 99.224,101.864 99.027,105.408 99.025,105.45 99.01,105.483 97.622,108.65 97.6,108.7 97.594,108.711 95.894,111.575 95.854,111.644 95.831,111.667 95.826,111.671 93.354,113.135
AVCC: C4.1 FB1.2 U1.16 | length 5.1
  Top Layer w0.2: v1(79.825,104.775) 79.825,104.707 79.949,104.584 79.949,104.241 C4.1@80.09,104.1 80.548,104.1 U1.16@81.255,103.393 ; v1(81.4,105.625) 82.075,105.625 FB1.2@82.225,105.775
  Bottom Layer w0.2: v1(79.825,104.775) 80.55,104.775 v1(81.4,105.625)
D0: ACE1.1 R22.2 U1.21 | length 17
  Top Layer w0.2: R22.2@67.565,96.245 ACE1.1@69.35,96.245 ; R22.2@67.7,96.26 R22.2@67.715,96.245 ; v1(77.216,101.829) 79.625,101.829 U1.21@79.656,101.798
  Bottom Layer w0.2: ACE1.1@69.342,96.241 71.079,97.978 71.079,101.87 71.377,102.168 76.81,102.168 77.148,101.829 v1(77.216,101.829)
D1: ACE1.2 R23.2 U1.20 | length 15.1
  Top Layer w0.2: R23.2@67.65,98.785 ACE1.2@69.35,98.785 ; v1(77.654,102.294) 77.678,102.319 78.776,102.319 78.78,102.315 79.787,102.315 U1.20@79.98,102.122
  Bottom Layer w0.2: ACE1.2@69.342,98.781 70.739,100.178 70.739,101.956 71.252,102.469 77.412,102.469 77.587,102.294 v1(77.654,102.294)
D2: ACE1.4 R24.2 U1.19 | length 13.4
  Top Layer w0.2: R24.2@67.5,103.865 ACE1.4@69.35,103.865 ; v1(78.09,102.771) 79.956,102.771 U1.19@80.292,102.435
  Bottom Layer w0.2: ACE1.4@69.342,103.861 69.883,103.861 70.403,103.342 70.973,102.771 v1(78.09,102.771)
D3: ACE1.5 R25.2 U1.17 | length 15.8
  Top Layer w0.2: R25.2@67.5,106.415 69.34,106.415 ACE1.5@69.35,106.405 ; v1(78.526,103.241) 78.593,103.241 78.652,103.3 80.699,103.3 80.73,103.27 80.742,103.27 U1.17@80.934,103.077
  Bottom Layer w0.2: ACE1.5@69.342,106.401 70.739,105.004 70.739,103.597 71.264,103.073 77.753,103.073 77.903,103.223 78.507,103.223 v1(78.526,103.241)
D4: ACE1.6 R18.2 U1.11 | length 15.6
  Top Layer w0.2: U1.11@83.474,102.753 84.074,103.353 v1(85.852,103.353) ; ACE1.6@94.75,106.405 R18.2@96.57,106.405 ; R18.2@96.445,106.405 R18.2@96.45,106.41
  Bottom Layer w0.2: v1(85.852,103.353) 85.9,103.305 86.077,103.305 86.085,103.297 86.42,103.297 86.571,103.147 92.885,103.147 93.218,103.48 93.218,104.877 ACE1.6@94.742,106.401
D5: ACE1.7 R19.2 U1.10 | length 13.4
  Top Layer w0.2: U1.10@83.792,102.435 84.202,102.845 v1(86.233,102.845) ; ACE1.7@94.75,103.865 R19.2@96.555,103.865 ; R19.2@96.43,103.865 R19.2@96.45,103.885
  Bottom Layer w0.2: v1(86.233,102.845) 93.095,102.845 93.52,103.269 93.637,103.386 93.726,103.386 94.201,103.861 ACE1.7@94.742,103.861
D6: ACE1.9 R20.2 U1.9 | length 15.2
  Top Layer w0.2: U1.9@84.11,102.116 84.331,102.337 v1(86.614,102.337) ; ACE1.9@94.75,98.785 R20.2@96.575,98.785
  Bottom Layer w0.2: v1(86.614,102.337) 86.65,102.337 86.856,102.543 92.631,102.543 93.345,101.829 93.345,100.178 ACE1.9@94.742,98.781
D7: ACE1.10 R21.2 U1.8 | length 17
  Top Layer w0.2: U1.8@84.428,101.805 86.971,101.805 v1(86.995,101.829) ; ACE1.10@94.75,96.245 R21.2@96.56,96.245 ; R21.2@96.435,96.245 R21.2@96.45,96.26
  Bottom Layer w0.2: v1(86.995,101.829) 87.408,102.242 92.506,102.242 93.043,101.704 93.043,97.94 ACE1.10@94.742,96.241
EN: Q1.1 R17.1 U1.1 | length 12.2
  Top Layer w0.2: Q1.1@73.875,96.875 73.913,96.913 v1@75.188,96.913 ; R17.1@74.95,97.86 74.95,97.293 75.188,97.055 v1@75.188,96.913 ; v1(75.225,96.95) v1@75.188,96.913 ; U1.1@82.527,98.939 v1(83.341,98.125)
  Bottom Layer w0.2: v1(75.225,96.95) 75.252,96.923 82.139,96.923 v1(83.341,98.125)
GND: C1.2 C2.2 C3.2 C4.2 C5.2 C6.2 C7.2 C8.2 IS1.9 IS1.24 IS1.28 IS1.33 LD1.2 P1.1 P1.3 P1.5 P1.7 P1.9 P1.11 P2.1 P2.3 P2.5 P2.7 P2.9 P2.11 P3.1 P3.4 P4.1 P4.4 R1.2 R18.1 R19.1 R20.1 R21.1 R22.1 R23.1 R24.1 R25.1 R30.2 U1.4 U1.18 U1.29 | length 52
  Top Layer w0.102: U1.18@80.61,102.753 U1.18@80.612,102.751 ; U1.29@82.044,101.319 U1.29@82.759,100.604
  Top Layer w0.2: v1(67.64,100.285) 67.64,99.675 R23.1@67.65,99.665 ; R22.1@67.65,97.14 v1(67.65,97.775) ; v1(67.65,102.35) R24.1@67.65,102.985 ; v1(67.65,104.9) R25.1@67.65,105.535 ; v1(74.025,103.85) P2.11@72.52,103.85 P2.9@72.52,105.12 72.531,105.131 v1(74.041,105.131) ; v1(74.041,106.401) 72.531,106.401 P2.7@72.52,106.39 P2.5@72.52,107.66 72.531,107.671 v1(74.041,107.671) ; v1(74.041,108.941) 72.531,108.941 P2.3@72.52,108.93 P2.1@72.52,110.2 72.531,110.211 v1(74.041,110.211) ; v1(75.175,93.2) C6.2@75.76,93.2 R30.2@75.76,94 v1(75.175,94) ; v1(78.65,104.1) C4.2@79.21,104.1 ; v1(79.075,93.4) 79.143,93.4 79.268,93.275 IS1.28@80.125,93.275 IS1.33@81.85,93.275 ; v1(79.575,97.375) 79.58,97.37 80.22,97.37 R1.2@80.225,97.365 C8.2@81.05,97.365 C8.2@81.055,97.37 ; LD1.2@80.425,109.525 LD1.2@80.55,109.525 ; v1(80.5,95.725) 80.65,95.575 IS1.24@80.65,95 80.65,94.475 v4(81.5,93.625) IS1.33@81.85,93.275 ; U1.18@80.618,102.757 U1.29@82.05,101.325 ; v1(81.175,109.525) LD1.2@80.55,109.525 ; v1(81.9,111.825) 81.887,111.813 81.352,111.813 C1.2@81.34,111.8 81.34,110.315 LD1.2@80.55,109.525 ; U1.29@82.759,100.604 84.213,99.15 v1(84.75,99.15) ; IS1.9@83.975,91.666 84.194,91.666 84.195,91.665 84.195,91.61 84.681,91.124 84.681,90.869 v1(84.725,90.825) ; IS1.9@83.975,91.675 83.45,91.675 v4(82.6,92.525) IS1.33@82.05,93.075 IS1.33@81.85,93.275 ; C3.2@85.315,98.225 v1(85.925,98.225) ; v1(86.575,98.65) C7.2@87.5,98.65 ; P1.9@87.745,105.395 87.745,104.125 87.77,104.15 88.111,103.809 v1(89.325,103.809) ; P1.7@87.745,106.39 87.745,107.596 P1.5@87.777,107.628 ; P1.5@87.745,107.66 P1.5@87.777,107.628 ; P1.3@87.745,109.205 87.745,110.475 88.325,110.475 88.632,110.168 88.651,110.186 v1(89.318,110.186) ; v1(89.31,107.64) 89.298,107.628 P1.5@87.777,107.628 ; R21.1@96.45,97.14 v1(96.45,97.775) ; R20.1@96.45,99.665 v1(96.45,100.325) ; v1(96.45,104.8) R18.1@96.45,105.46 ; v1(96.475,102.275) 96.475,102.76 R19.1@96.65,102.935
  other v1: 82.55,109.7
  other v2: 82.025,84.75 76.675,85.45 86.95,85.525 93.45,88.975 77.175,89.25 72.45,90.75 68.7,90.875 96.375,92.75 66.4,93.95 65.4,98.7 65.375,104.25 96.925,107.675 67.65,110.05 94.1,111.85 70.6,113.5 75.05,116.1 88.925,116.275
  other v4: 81.5,92.525 82.6,93.625
  other v5: 82.05,100.476 81.201,101.325 82.899,101.325 82.05,102.174
INT: P1.12 P2.12 R27.2 U1.6 | length 28.1
  Top Layer w0.2: P2.12@76.33,103.85 76.61,104.13 77.762,104.13 77.957,104.325 v1(78.025,104.325) ; v1(83.198,104.673) 83.224,104.699 R27.2@83.224,106.059 ; R27.2@83.223,106.058 R27.2@83.224,106.059 ; R27.2@83.25,106.085 R27.2@83.224,106.059 ; U1.6@84.118,100.53 84.313,100.335 88.135,100.335 90.992,103.192 90.992,103.845 91.272,104.125 P1.12@91.28,104.125 ; v1(89.925,104.175) 89.97,104.13 91.275,104.13 P1.12@91.28,104.125 ; P1.12@91.555,103.85 P1.12@91.28,104.125 ; P1.12@91.555,104.125 P1.12@91.28,104.125
  Bottom Layer w0.2: v1(78.025,104.325) 78.071,104.325 79.99,106.243 81.628,106.243 v1(83.198,104.673) 89.427,104.673 v1(89.925,104.175)
MISO: J1.2 P1.2 P2.2 | length 17.1
  Top Layer w0.2: P2.2@76.33,110.2 78.633,110.2 78.7,110.133 J1.2@78.75,110.083 78.875,110.208 v1(78.875,110.9) ; P1.2@91.555,110.2 91.6,110.245 v1(91.6,111.1)
  Bottom Layer w0.2: v1(78.875,110.9) 78.892,110.9 79.117,111.125 91.575,111.125 v1(91.6,111.1)
MISO_T88: J1.1 P2.4 U1.14 | length 9.4
  Top Layer w0.2: P2.4@76.327,108.941 76.454,109.068 J1.1@78.74,109.068 ; J1.1@78.75,109.067 78.75,107.939 79.127,107.562 79.127,107.123 82.45,103.8 U1.14@82.533,103.717
MOSI_T88: P1.4 U1.13 | length 11.6
  Top Layer w0.2: U1.13@82.837,103.389 83.032,103.584 85.9,106.452 85.9,107.925 86.217,108.242 89.767,108.242 90.203,108.678 91.05,108.678 P1.4@91.297,108.925
NetIS1_1: IS1.1 R4.1 | length 2.2
  Top Layer w0.2: R4.1@79.35,89.69 79.414,89.754 79.414,90.114 79.683,90.383 80.093,90.383 80.65,90.94 IS1.1@80.65,91.15
NetIS1_2: IS1.2 R13.1 | length 1.8
  Top Layer w0.2: R13.1@80.125,89.69 80.225,89.79 80.225,90 81.04,90.815 81.04,91.14 IS1.2@81.05,91.15
NetIS1_3: IS1.3 R5.1 | length 1.7
  Top Layer w0.2: R5.1@80.9,89.69 80.9,90.175 81.44,90.715 81.44,91.14 IS1.3@81.45,91.15
NetIS1_4: IS1.4 R6.1 | length 1.5
  Top Layer w0.2: R6.1@81.675,89.69 81.7,89.715 81.7,90.25 81.85,90.4 IS1.4@81.85,91.15
NetIS1_5: IS1.5 R14.1 | length 1.5
  Top Layer w0.2: IS1.5@82.25,91.15 82.25,90.475 82.45,90.275 R14.1@82.45,89.69
NetIS1_6: IS1.6 R7.1 | length 1.7
  Top Layer w0.2: IS1.6@82.65,91.15 82.66,91.14 82.66,90.715 83.225,90.15 R7.1@83.225,89.69
NetIS1_7: IS1.7 R8.1 | length 3.2
  Top Layer w0.2: IS1.7@83.05,91.15 83.06,91.14 83.06,90.825 84.21,89.675 R8.1@85.435,89.675
NetIS1_8: IS1.8 R15.1 | length 2.6
  Top Layer w0.2: IS1.8@83.45,91.15 83.45,90.94 84.189,90.201 85.19,90.201 85.435,90.446 R15.1@85.435,90.45
NetIS1_10: IS1.10 R9.1 | length 1.8
  Top Layer w0.2: IS1.10@83.975,92.075 84.568,92.075 85.257,91.386 85.277,91.386 85.435,91.229 R9.1@85.435,91.225
NetIS1_11: IS1.11 R10.1 | length 1.7
  Top Layer w0.2: IS1.11@83.975,92.475 84.595,92.475 84.909,92.161 85.277,92.161 85.435,92.004 R10.1@85.435,92
NetIS1_12: IS1.12 R16.1 | length 1.5
  Top Layer w0.2: IS1.12@83.975,92.875 84.669,92.875 84.794,92.75 R16.1@85.435,92.75
NetIS1_13: IS1.13 R11.1 | length 1.6
  Top Layer w0.2: IS1.13@83.975,93.275 84.606,93.275 84.856,93.525 R11.1@85.435,93.525
NetIS1_17: IS1.17 LED26.1 LED26.3 LED26.5 LED27.1 LED27.3 LED27.5 LED28.1 LED28.3 LED28.5 LED29.1 LED29.3 LED29.5 LED30.1 LED30.3 LED30.5 | length 148.2
  Top Layer w0.2: IS1.17@83.45,95 87.375,95 92.2,90.175 v1(92.2,82.95)
  Bottom Layer w0.2: 61.848,100.459 cw(c62.651,100.512) 61.848,100.561 62.062,104.02 62.128,104.643 62.939,108.738 LED26.1@63.081,111.196 LED26.3@63.531,111.975 LED26.5@63.981,112.754 66.006,114.054 67.899,115.702 cw(c68.428,115.095) 67.921,115.72 70.691,117.968 71.194,118.334 74.379,119.958 74.946,120.21 78.392,121.143 78.998,121.272 79.028,121.276 cw(c79.135,120.48) 79.043,121.278 83.284,121.773 LED30.1@85.625,122.408 LED30.3@86.506,122.22 LED30.5@87.386,122.033 89.286,120.48 ccw(c89.414,120.637) 89.311,120.463 92.922,118.318 cw(c92.513,117.625) 92.987,118.275 93.389,117.983 cw(c92.917,117.331) 93.423,117.957 96.201,115.723 cw(c95.697,115.095) 96.296,115.633 96.629,115.263 cw(c96.032,114.723) 96.66,115.226 98.888,112.451 cw(c98.262,111.946) 98.96,112.347 99.208,111.916 cw(c98.512,111.513) 99.23,111.876 100.843,108.709 cw(c100.126,108.343) 100.892,108.59 100.978,108.326 101.046,108.117 cw(c100.281,107.867) 101.052,108.098 101.673,106.045 ccw(c101.864,106.103) 101.722,105.963 LED29.1@103.174,104.511 LED29.3@103.268,103.616 LED29.5@103.362,102.721 102.524,100.443 101.592,96.266 101.401,95.676 100.15,92.339 99.839,91.801 97.887,88.787 97.47,88.324 97.464,88.318 cw(c96.877,88.868) 97.447,88.3 94.944,85.785 cw(c94.373,86.352) 94.923,85.764 93.145,84.102 93.075,84.032 92.197,82.952 LED28.1@91.571,82.183 LED28.3@90.749,81.817 LED28.5@89.927,81.451 87.569,81.58 87.464,81.58 83.325,81.17 82.575,81.17 79.095,81.343 cw(c79.135,82.147) 79.034,81.348 79,81.353 78.39,81.482 74.921,82.44 74.354,82.692 71.17,84.315 69.003,85.527 LED27.1@66.724,86.428 LED27.3@66.122,87.097 LED27.5@65.52,87.766 64.889,90.108 63.925,92.365 62.674,95.726 62.482,96.318 62.473,96.366 cw(c63.263,96.52) 62.468,96.391 61.914,99.824 61.849,100.443 61.848,100.459
NetIS1_18: IS1.18 LED21.1 LED21.3 LED21.5 LED22.1 LED22.3 LED22.5 LED23.1 LED23.3 LED23.5 LED24.1 LED24.3 LED24.5 LED25.1 LED25.3 LED25.5 | length 167.7
  Top Layer w0.2: IS1.18@83.05,95 83.05,95.4 83.172,95.522 87.728,95.522 92.725,90.525 92.725,83.1 92.725,83.099 cw(c91.969,83.099) 92.233,82.39 88.151,80.859 ccw(c88.221,80.671) 88.054,80.782 v1@88.05,80.776
  Mid Layer 2 w0.2: v1(62.725,92.075) 61.312,93.033 61.297,93.043 61.245,93.095 60.005,97.882 60,97.9 59.701,102.528 59.701,102.534 59.701,102.556 59.714,102.636 60.447,107.18 60.45,107.2 62.068,111.457 62.075,111.475 63.498,113.756 cw(c64.6,113.07) 64.692,114.365 64.695,114.365 64.916,114.349 cw(c64.903,114.15) 64.989,114.331 v1@64.999,114.326 ; v1(64.275,89.25) 64.056,88.822 ccw(c64.888,88.394) 64.194,87.766 64.195,87.765 66.191,85.578 ccw(c66.339,85.713) 66.212,85.558 69.725,82.675 69.745,82.665 74,80.525 74.019,80.52 78.55,79.25 78.569,79.248 80.9,79.05 83.871,79.05 83.932,79.111 83.934,79.114 v1(84.85,80.1) ; v1(67.225,116.8) 67.225,118.022 67.285,118.082 67.345,118.139 68.21,118.961 68.225,118.975 71.908,121.24 71.925,121.25 76.257,122.868 76.275,122.875 76.31,122.881 80.88,123.622 80.896,123.624 80.916,123.624 85.653,123.426 85.675,123.425 85.748,123.406 88.303,122.733 cw(c88.005,121.62) 89.141,121.814 89.141,121.812 89.2,121.472 cw(c89.004,121.437) 89.202,121.414 v1@89.201,121.401 ; v1(88.05,80.775) 89.559,80.404 89.637,80.384 ; 89.699,80.384 89.734,80.399 92.2,81.375 92.218,81.387 96.074,83.949 ; v1(92.2,120.2) 93.601,120.2 cw(c93.601,119.176) 94.325,119.9 96.118,118.58 96.125,118.575 97.841,117.058 97.845,117.054 97.854,117.045 97.908,116.984 99.393,115.307 99.4,115.3 100.769,113.408 100.775,113.4 100.807,113.345 101.92,111.409 101.925,111.4 101.946,111.352 102.846,109.309 102.85,109.3 102.863,109.26 103.572,107.06 103.575,107.05 103.581,107.019 104.023,104.884 104.025,104.875 104.027,104.855 104.293,102.589 ; 96.09,83.965 99.35,87.3 99.361,87.316 101.902,91.191 101.925,91.225 101.933,91.244 103.256,94.601 103.275,94.65 103.278,94.661 103.313,94.792 103.349,94.923 103.384,95.054 103.823,96.675 103.823,96.784 103.757,96.85 103.748,96.857 v1(103.075,97.4) ; v1(103.368,100.759) 103.368,100.864 cw(c103.568,100.864) 103.396,100.964 104.267,102.465 ccw(c104.094,102.566) 104.293,102.589
  Bottom Layer w0.2: v1(62.725,92.075) LED22.5@63.056,91.479 LED22.3@63.506,90.7 LED22.1@63.956,89.921 v1(64.275,89.25) ; v1(65,114.325) LED21.1@65.57,114.909 LED21.3@66.172,115.578 LED21.5@66.774,116.247 v1(67.225,116.8) ; v1(84.85,80.1) LED23.5@85.625,80.267 LED23.3@86.506,80.454 LED23.1@87.386,80.642 v1(88.05,80.775) ; v1(89.2,121.4) LED25.1@89.927,121.174 LED25.3@90.749,120.808 LED25.5@91.571,120.442 91.615,120.442 cw(c91.615,119.615) v1(92.2,120.2) ; v1(103.075,97.4) LED24.5@103.199,98.239 LED24.3@103.293,99.134 LED24.1@103.387,100.029 v1(103.368,100.759)
NetIS1_19: IS1.19 LED16.1 LED16.3 LED16.5 LED17.1 LED17.3 LED17.5 LED18.1 LED18.3 LED18.5 LED19.1 LED19.3 LED19.5 LED20.1 LED20.3 LED20.5 | length 151.3
  Top Layer w0.2: IS1.19@82.65,95 82.66,95.01 82.66,95.437 83.047,95.823 88.327,95.823 v1(89.775,94.375)
  Mid Layer 2 w0.2: v1(61.175,96.425) 62.28,97.914 62.319,97.967 62.319,98.042 61.952,102.074 61.952,102.083 61.952,102.109 61.965,102.189 62.647,106.208 62.65,106.225 64.042,110.203 64.05,110.225 66.29,113.709 cw(c66.458,113.601) 66.314,113.739 68.085,115.586 68.086,115.587 ccw(c67.144,116.493) 68.37,116.944 68.37,116.946 v1(68.15,117.55) ; v1(62.3,93.225) 62.808,93.328 62.81,93.329 cw(c63.041,92.21) 64.052,92.743 64.053,92.74 65.366,90.266 ccw(c65.543,90.36) 65.386,90.236 67.944,87.008 67.959,86.993 67.967,86.986 71.275,84.275 71.294,84.265 74.975,82.4 74.996,82.395 79.095,81.351 79.137,81.309 79.14,81.306 v1(80.35,79.975) ; v1(70.85,119.525) 72.637,119.09 72.66,119.085 72.724,119.085 76.555,120.667 76.575,120.675 76.614,120.682 80.77,121.399 85.031,121.101 85.05,121.1 89.212,120.014 cw(c89.161,119.821) 89.251,119.999 91.288,118.981 ccw(c91.897,120.196) 92.731,119.122 v1(93.25,119.525) ; v1(83.725,80) ccw(c83.565,80.12) 83.763,80.089 83.861,80.692 cw(c84.741,80.55) 84.615,81.432 84.616,81.433 87.563,81.862 ccw(c87.534,82.06) 87.614,81.876 92.475,84 92.493,84.013 94.85,85.725 96.613,87.488 ; v1(89.775,94.375) 89.775,94.325 96.613,87.488 ; v1(96.025,117.625) 96.121,115.842 96.125,115.775 98.836,112.567 98.85,112.55 98.883,112.487 100.814,108.772 100.825,108.75 100.836,108.703 101.771,104.815 101.775,104.8 101.777,104.776 102.049,101.386 102.05,101.378 102.05,101.367 102.025,100.585 102.025,100.575 101.756,98.467 101.755,98.466 ccw(c103.627,98.235) 102.652,96.621 102.653,96.621 102.887,96.48 cw(c102.784,96.308) 102.914,96.46 v1@102.925,96.451 ; v1(101.8,93.175) 100.405,92.826 100.351,92.813 100.28,92.741 100.108,92.247 100.1,92.225 100.076,92.187 98.329,89.456 98.325,89.45 97.634,88.512 97.625,88.5 96.613,87.488
  Bottom Layer w0.2: v1(61.175,96.425) LED17.5@61.438,95.664 LED17.3@61.716,94.808 LED17.1@61.994,93.952 v1(62.3,93.225) ; v1(68.15,117.55) LED16.1@68.753,118.038 LED16.3@69.481,118.567 LED16.5@70.21,119.096 v1(70.85,119.525) ; v1(80.35,79.975) LED18.5@81.15,79.975 LED18.3@82.05,79.975 LED18.1@82.95,79.975 v1(83.725,80) ; v1(93.25,119.525) LED20.1@93.89,119.096 ; LED20.3@94.619,118.567 LED20.5@95.347,118.038 v1(96.025,117.625) ; v1(101.8,93.175) LED19.5@102.081,93.902 LED19.3@102.359,94.758 LED19.1@102.637,95.614 v1(102.925,96.45)
NetIS1_20: IS1.20 LED11.1 LED11.3 LED11.5 LED12.1 LED12.3 LED12.5 LED13.1 LED13.3 LED13.5 LED14.1 LED14.3 LED14.5 LED15.1 LED15.3 LED15.5 | length 164
  Top Layer w0.2: IS1.20@82.25,95 82.26,95.01 82.26,95.463 82.922,96.125 88.813,96.125 v1(90.562,94.375)
  Mid Layer 1 w0.2: 59.799,101.343 59.726,102.478 59.726,102.485 59.726,102.506 59.738,102.586 60.447,107.179 60.45,107.2 62.118,111.581 62.125,111.6 64.588,115.431 64.599,115.449 ; 59.863,101.279 59.876,101.27 v1(60.625,100.725) ; 60.405,96.035 61.274,93.112 ccw(c61.465,93.169) 61.287,93.079 63.25,89.175 63.264,89.158 66.119,85.632 66.133,85.618 66.14,85.612 69.7,82.675 69.72,82.665 73.925,80.55 73.941,80.545 74.702,80.313 74.778,80.289 74.854,80.289 74.896,80.31 v1(75.95,80.825) ; 60.405,96.036 cw(c61.708,96.416) 60.846,97.464 v1(60.95,97.55) ; 64.615,115.465 64.675,115.523 68.217,118.963 ; 68.217,118.963 cw(c68.356,118.819) 68.251,118.99 70.669,120.479 70.67,120.479 cw(c71.068,119.833) 71.607,120.368 71.609,120.366 71.804,120.171 cw(c71.663,120.029) v1@71.85,120.1 ; v1(74.9,121.5) 76.178,122.874 76.18,122.877 76.229,122.926 76.309,122.938 80.93,123.647 80.945,123.649 80.965,123.649 85.7,123.426 85.725,123.425 90.108,122.105 90.125,122.1 90.169,122.078 94.081,120.109 94.1,120.1 96.85,117.9 v1(96.9,116.8) ; v1(79.2,80.025) 79.636,79.13 79.717,79.049 79.797,79.047 83.027,78.977 83.109,78.975 ; 83.127,78.975 83.143,78.978 87.85,79.725 87.871,79.733 92.2,81.45 92.216,81.461 96.075,83.95 96.09,83.965 98.478,86.372 ; v1@90.55,94.25 90.6,94.25 98.478,86.372 ; v1(99.075,114.3) 99.975,114.388 99.984,114.389 100.077,114.389 100.153,114.313 100.194,114.245 101.87,111.48 101.9,111.45 103.568,107.069 103.575,107.05 103.581,107.014 104.297,102.592 104.3,102.576 104.3,102.559 104.275,100.225 104.076,97.813 104.075,97.8 103.602,95.634 103.6,95.625 102.83,93.182 cw(c102.639,93.242) 102.821,93.159 102.417,92.28 cw(c102.235,92.363) 102.268,92.165 v1(101.425,92.025) ; v1(99.725,89.225) 99.82,87.973 99.82,87.965 ; 99.82,87.893 99.384,87.288 99.375,87.275 98.478,86.372
  Bottom Layer w0.2: v1(60.625,100.725) LED12.5@60.688,100.054 LED12.3@60.782,99.159 LED12.1@60.876,98.264 v1(60.95,97.55) ; v1(71.85,120.1) LED11.1@72.529,120.442 LED11.3@73.351,120.808 LED11.5@74.173,121.174 v1(74.9,121.5) ; v1(75.95,80.825) LED13.5@76.714,80.617 LED13.3@77.594,80.429 LED13.1@78.475,80.242 v1(79.2,80.025) ; v1(96.9,116.8) LED15.1@97.351,116.247 LED15.3@97.953,115.578 LED15.5@98.555,114.909 v1(99.075,114.3) ; v1(99.725,89.225) LED14.5@100.119,89.896 LED14.3@100.569,90.675 LED14.1@101.019,91.454 v1(101.425,92.025)